# Allegro board PCB_STABILIZATOR_EFTIMIE1.brd
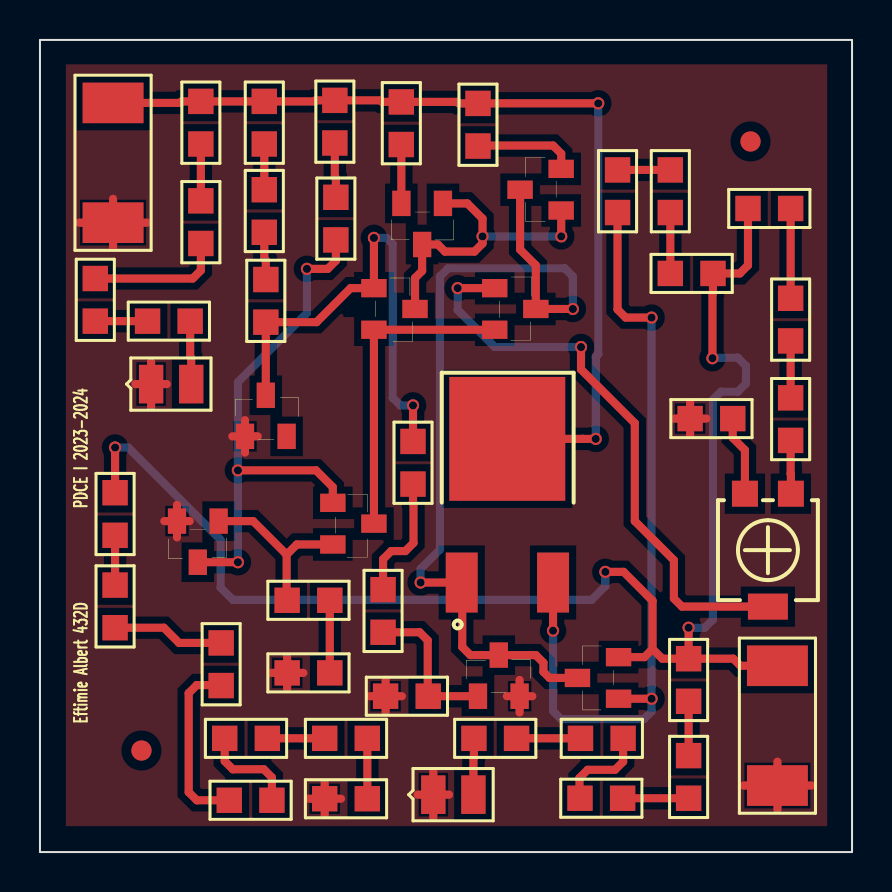
[diagram p0: board, top side]
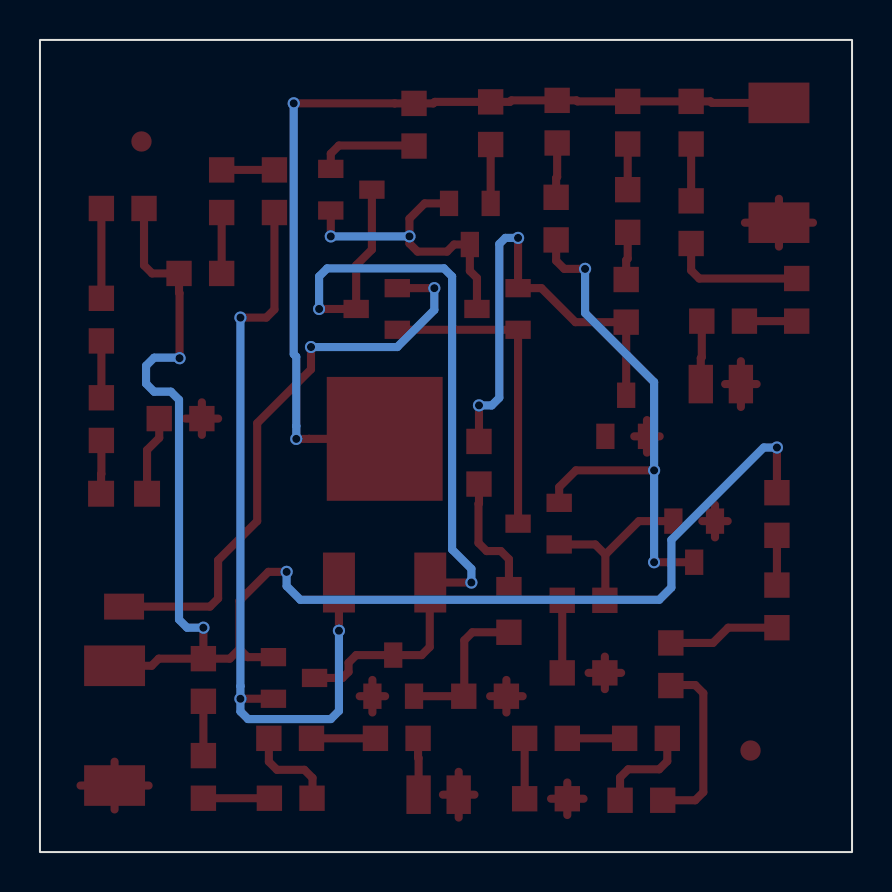
[diagram p1: board, bottom side, seen from below]

Outline 40.64 x 40.64 mm; copper layers: TOP, BOTTOM. Coordinates in mm from the lower left corner of the outline.
Outline path: rectangle 0,0 40.64,40.64

## Design rules (mm)
nets with their own width: min track width 0.406; nets 0 N63757 N63835 N63897 N63943 N63947 N63959 N63973 N63979 N64029 N64035 N64069 N64259 N64293 N64391 N64455 N64475 N64651 N64657 N64663 N64673 N64701 N64747 N64753 N64969 N65063 N65069 N65101 N68388 N68397 N68411 N68435 N637451 N639930 N640550 N640551 N642471 N645031 N647151 N647871

## Placement (name value [footprint] x y rotation side)
D2  BZX84-C5V1  [TO236AA]  10.26 20.8 270 top
D3  SMLS14BET  [SMD0805]  19.68 2.87 0 top
D4  SMLS14BET  [SMD0805]  5.56 23.42 0 top
J1  CON2  [SMR2512]  36.91 9.32 270 top
J2  CON2  [SMR2512]  3.66 37.49 270 top
NOREF  -  []  40.64 0 90 top
NOREF#2  -  [unnamed#2]  5.08 5.08 0 top
NOREF#3  -  [unnamed#2]  35.56 35.56 0 top
NOREF#4  -  []  0 40.64 0 top
Q1  QBC856B  [TO236AA]  20.17 32.46 90 top
Q2  QBC856B  [TO236AA]  26.09 32.11 0 top
Q3  QBC846B  [TO236AA]  16.71 28.22 180 top
Q4  QBC846B  [TO236AA]  22.76 28.22 180 top
Q5  QBC846B  [TO236AA]  14.66 17.48 180 top
Q6  QBC846B  [TO236AA]  8.94 16.56 90 top
Q7  QBC846B  [TO236AA]  28.96 7.67 0 top
Q8  QBC846B  [TO236AA]  21.92 7.8 270 top
Q9  QMJD31C  [DPACK]  21.11 13.49 0 top
R1  100  [SMR0805]  11.23 35.43 90 top
R2  2k  [SMR0805]  11.23 31.01 90 top
R3  1k  [SMR0805]  11.3 26.52 90 top
R4  3.9k  [SMR0805]  14.76 35.48 90 top
R5  680  [SMR0805]  14.81 30.63 90 top
R6  220  [SMR0805]  18.08 35.41 90 top
R7  220  [SMR0805]  21.92 35.33 90 top
R8  100  [SMR0805]  14.5 12.6 180 top
R9  8.2k  [SMR0805]  18.67 18.41 90 top
R10  510  [SMR0805]  17.17 11 90 top
R11  1k  [SMR0805]  17.3 7.8 0 top
R12  0.47  [SMR0805]  31.55 34.14 270 top
R13  0.47  [SMR0805]  31.55 28.96 0 top
R14  5.6k  [SMR0805]  37.57 32.21 180 top
R15  220  [SMR0805]  37.57 25.58 90 top
R16  68  [SMR0805]  37.57 20.6 90 top
R17  10K  [TS53YL]  35.28 17.93 90 top
R18  10k  [SMR0805]  32.54 21.69 0 top
R19  100  [SMR0805]  3.76 15.85 90 top
R20  100  [SMR0805]  3.76 11.23 90 top
R21  10  [SMR0805]  9.07 8.33 90 top
R22  100  [SMR0805]  11.61 2.59 180 top
R23  100  [SMR0805]  11.38 5.69 180 top
R25  10  [SMR0805]  16.38 5.69 180 top
R26  51  [SMR0805]  14.25 2.67 0 top
R32  330  [SMR0805]  8.05 35.43 90 top
R33  100  [SMR0805]  32.46 7.54 90 top
R34  100  [SMR0805]  32.46 2.69 90 top
R35  100  [SMR0805]  27.03 2.69 0 top
R36  100  [SMR0805]  27.05 5.69 0 top
R37  82  [SMR0805]  21.72 5.69 0 top
R38  220  [SMR0805]  8.05 30.45 90 top
R39  330  [SMR0805]  2.77 26.57 90 top
R40  330  [SMR0805]  7.52 26.57 180 top
R41  0.47  [SMR0805]  28.91 34.14 270 top
R42  33  [SMR0805]  12.37 8.97 0 top

## Library data of the parts
D2 = BZX84-C5V1_3
D3 = SMLS14BET_3
D4 = SMLS14BET_2
J1 J2 = CON2
Q1 Q2 = QBC856B_0
Q3-Q8 = QBC846B_0
Q9 = QMJD31C_0
R1-R16 R18-R23 R25 R26 R32-R42 = R
R17 = POT

## Footprints (pads in the part's own frame, mm; a bottom-side part is the same pattern mirrored in y, then rotated)
DPACK
  rect 1.6x3 smd: 1(0,0) 3(4.57,0)
  rect 5.8x6.2 smd: 2(2.28,7.19)
SMD0805
  rect 1.219x1.93 smd: A(2.007,0) C(0,0)
SMR0805
  rect 1.27x1.27 smd: 1(0,0) 2(2.134,0)
SMR2512
  rect 2.032x3.048 smd: 1(0,0) 2(5.994,0)
TO236AA
  rect 1.27x0.914 smd: 1(0,0) 2(0,2.083) 3(-2.057,1.041)
TS53YL
  rect 1.3x1.3 smd: 1(0,0) 3(0,-2.3)
  rect 1.3x2 smd: 2(-5.65,-1.15)
unnamed#2
  round 1.016 smd: (0,0)

## Nets
0: D2.1(A) D3.C D4.C J1.2 J2.2 Q6.2(E) Q8.2(E) R11.1 R18.1 R26.1 R42.1
N63757: D2.3(C) Q3.1(B) R3.1 R9.2
N63835: Q8.1(B) R10.1 R11.2
N63897: Q5.2(E) Q6.1(B) R8.2
N63943: J2.1 Q9.2(C) R1.2 R4.2 R6.2 R7.2 R32.2
N63947: R8.1 R42.2
N63959: Q2.3(C) Q4.3(C) Q7.3(C) Q8.3(C) Q9.1(B)
N63973: Q1.1(B) Q1.3(C) Q2.1(B) Q3.3(C)
N63979: Q1.2(E) R6.1
N64029: Q2.2(E) R7.1
N64035: Q7.1(B) Q9.3(E) R41.2
N64069: R16.1 R17.3(2)
N64259: J1.1 Q7.2(E) R13.2 R14.2 R19.2 R33.2
N64293: Q3.2(E) Q4.2(E) Q5.3(C)
N64391: Q4.1(B) R17.2(T)
N64455: R17.1 R18.2
N64475: Q5.1(B) Q6.3(C) R5.1
N64651: R33.1 R34.2
N64657: R34.1 R35.2
N64663: R35.1 R36.2
N64673: R36.1 R37.2
N64701: R32.1 R38.2
N64747: D4.A R40.1
N64753: R39.1 R40.2
N64969: R12.1 R41.1
N65063: R1.1 R2.2
N65069: R2.1 R3.2
N65101: R4.1 R5.2
N68388: R25.1 R26.2
N68397: R23.1 R25.2
N68411: R22.1 R23.2
N68435: R21.1 R22.2
N637451: R9.1 R10.2
N639930: R20.1 R21.2
N640550: R14.1 R15.2
N640551: R15.1 R16.2
N642471: D3.A R37.1
N645031: R19.1 R20.2
N647151: R38.1 R39.2
N647871: R12.2 R13.1

Pads without a net: D2 2

## Via types
v1: diameter 0.61, hole 0.406, TOP to BOTTOM, 20 vias

## Routing (per net, layer and track width the routed paths; a pad name or vN(x,y) marks a point on that pad's centre or on a via; arc(x,y) is an arc through that point)
0: length 41
  TOP w0.406: 35.2,3.33 J1.2 ; J1.2 36.91,4.52 ; J1.2 36.91,2.13 ; J1.2 38.61,3.33 ; R18.1 33.35,21.69 ; R18.1 32.54,20.88 ; R18.1 31.72,21.69 ; R18.1 32.54,22.5 ; 13.44,2.67 R26.1 ; R26.1 14.25,3.48 ; R26.1 14.25,1.85 ; R26.1 15.06,2.67 ; D2.1 10.9,20.8 ; D2.1 10.26,19.99 ; D2.1 9.63,20.8 ; D2.1 10.26,21.62 ; 6.22,16.56 Q6.2 ; Q6.2 7.49,16.56 ; Q6.2 6.86,17.37 ; Q6.2 6.86,15.75 ; D4.C 6.35,23.42 ; D4.C 5.56,22.28 ; D4.C 5.56,24.56 ; D4.C 4.77,23.42 ; Q8.2 24.64,7.8 ; Q8.2 23.37,7.8 ; Q8.2 24,8.61 ; Q8.2 24,6.98 ; D3.C 20.47,2.87 ; D3.C 19.68,1.73 ; D3.C 18.9,2.87 ; D3.C 19.68,4.01 ; 1.96,31.5 J2.2 ; J2.2 5.36,31.5 ; J2.2 3.66,32.69 ; J2.2 3.66,30.3 ; 17.3,6.98 R11.1 ; R11.1 18.11,7.8 ; R11.1 17.3,8.61 ; R11.1 16.48,7.8 ; R42.1 13.18,8.97 ; R42.1 12.37,9.78 ; R42.1 11.56,8.97 ; R42.1 12.37,8.15
N63757: length 24
  TOP w0.406: v1(16.71,30.73) Q3.1 15.54,28.22 13.84,26.52 R3.1 11.3,22.86 ; R9.2 v1(18.67,22.35)
  BOTTOM w0.406: v1(16.71,30.73) 17.35,30.73 17.65,30.43 17.65,22.73 18.03,22.35 v1(18.67,22.35)
N63835: length 7.7
  TOP w0.406: Q8.1 R11.2 19.41,7.82 19.41,10.59 19,11 R10.1
N63897: length 8.9
  TOP w0.406: 12.34,14.88 12.85,15.39 Q5.2 ; 12.34,14.88 10.67,16.56 Q6.1 ; 12.34,14.88 12.34,12.62 R8.2
N63943: length 45.7
  TOP w0.406: Q9.2 27.18,20.68 27.18,20.68 v1(27.81,20.68) ; J2.1 7.01,37.49 7.09,37.57 R32.2 R1.2 13.74,37.57 13.79,37.62 R4.2 17.04,37.62 17.12,37.54 R6.2 20.88,37.54 20.95,37.47 R7.2 22.89,37.47 22.89,37.47 v1(27.94,37.47)
  BOTTOM w0.406: v1(27.94,37.47) 27.94,24.92 27.81,24.79 27.81,21.31 27.81,21.31 v1(27.81,20.68)
N63947: length 3.6
  TOP w0.406: R8.1 R42.2
N63959: length 44.5
  TOP w0.406: Q7.3 25.5,8.71 25.2,9.02 25.2,9.47 24.82,9.86 Q8.3 21.54,9.86 21.13,10.26 21.13,13.46 Q9.1 v1(19.05,13.49) ; Q2.3 24.03,30.15 24.82,29.36 Q4.3 v1(26.67,27.18)
  BOTTOM w0.406: v1(19.05,13.49) 19.05,14.17 20.02,15.14 20.02,28.8 20.42,29.21 26.26,29.21 26.67,28.8 v1(26.67,27.18)
N63973: length 15.5
  TOP w0.406: Q2.1 v1(26.09,30.81) ; Q1.1 21.39,32.46 22.15,31.7 v1(22.15,30.81) 22.15,30.45 21.74,30.05 20.27,30.05 19.91,30.4 Q1.3 19.13,29.08 18.77,28.73 Q3.3
  BOTTOM w0.406: v1(22.15,30.81) v1(26.09,30.81)
N63979: length 2.9
  TOP w0.406: Q1.2 R6.1
N64029: length 5.1
  TOP w0.406: R7.1 21.95,35.36 25.68,35.36 26.09,34.95 Q2.2
N64035: length 39.8
  TOP w0.406: R41.2 28.91,27.15 29.31,26.75 v1(30.61,26.75) ; v1(30.61,7.67) Q7.1 ; Q9.3 v1(25.68,11.08)
  BOTTOM w0.406: v1(30.61,26.75) 30.61,8.31 30.61,8.31 v1(30.61,7.67) 30.61,7.04 30.23,6.65 26.08,6.65 25.68,7.06 v1(25.68,11.08)
N64069: length 2.7
  TOP w0.406: R17.3 37.58,18.91 37.57,18.93 R16.1
N64259: length 73.9
  TOP w0.406: v1(28.3,14.02) 29.21,14.02 30.66,12.57 30.66,10.16 ; 30.66,10.16 31.14,9.68 R33.2 ; 30.66,10.16 30.25,9.75 Q7.2 ; R33.2 34.7,9.68 35.05,9.32 J1.1 ; R33.2 v1(32.46,11.23) ; R19.2 v1(3.76,20.24) ; R14.2 35.43,29.36 35.03,28.96 R13.2 33.68,27.99 33.66,27.97 v1(33.66,24.71)
  BOTTOM w0.406: v1(33.66,24.71) 33.68,24.74 34.92,24.74 35.33,24.33 35.33,23.44 34.92,23.04 34.09,23.04 33.68,22.63 33.68,11.63 33.27,11.23 v1(32.46,11.23) ; v1(3.76,20.24) 4.42,20.24 9.04,15.62 9.04,13.23 9.65,12.62 27.61,12.62 28.3,13.31 v1(28.3,14.02)
N64293: length 15.7
  TOP w0.406: Q4.2 Q3.2 Q5.3
N64391: length 29.3
  TOP w0.406: R17.2 32.13,12.28 31.72,12.69 31.72,14.61 29.77,16.56 29.77,21.46 27.08,24.16 v1(27.08,25.27) ; Q4.1 v1(20.9,28.22)
  BOTTOM w0.406: v1(20.9,28.22) 20.9,27.13 22.76,25.27 v1(27.08,25.27)
N64455: length 4
  TOP w0.406: R18.2 34.67,20.73 35.28,20.12 R17.1
N64475: length 26.7
  TOP w0.406: Q5.1 14.66,18.26 13.82,19.1 v1(9.91,19.1) ; v1(13.36,29.18) 14.4,29.18 14.81,29.59 R5.1 ; Q6.3 v1(9.91,14.5)
  BOTTOM w0.406: v1(9.91,14.5) v1(9.91,19.1) 9.91,23.52 13.36,26.97 v1(13.36,29.18)
N64651: length 2.7
  TOP w0.406: R34.2 R33.1
N64657: length 3.3
  TOP w0.406: R35.2 R34.1
N64663: length 4.7
  TOP w0.406: R35.1 27,2.72 27,3.71 27.41,4.11 28.78,4.11 29.18,4.52 R36.2
N64673: length 3.2
  TOP w0.406: R37.2 R36.1
N64701: length 2.8
  TOP w0.406: R32.1 R38.2
N64747: length 3.2
  TOP w0.406: D4.A 7.57,24.71 7.52,24.77 R40.1
N64753: length 2.6
  TOP w0.406: R40.2 R39.1
N64969: length 2.6
  TOP w0.406: R41.1 R12.1
N65063: length 2.3
  TOP w0.406: R1.1 R2.2
N65069: length 2.4
  TOP w0.406: R3.2 11.3,29.62 11.23,29.69 R2.1
N65101: length 2.7
  TOP w0.406: R5.2 14.81,33.73 14.76,33.78 R4.1
N68388: length 3
  TOP w0.406: R26.2 R25.1
N68397: length 2.9
  TOP w0.406: R23.1 R25.2
N68411: length 5
  TOP w0.406: R23.2 9.25,4.55 9.65,4.14 11.2,4.14 11.61,3.73 R22.1
N68435: length 9
  TOP w0.406: R22.2 7.85,2.59 7.44,3 7.44,7.95 7.85,8.36 9.04,8.36 R21.1
N637451: length 6.3
  TOP w0.406: R10.2 17.17,14.66 17.58,15.06 18.29,15.06 18.69,15.47 18.69,17.42 18.67,17.45 R9.1
N639930: length 5.6
  TOP w0.406: R21.2 6.96,10.46 6.2,11.23 R20.1
N640550: length 4.5
  TOP w0.406: R14.1 R15.2
N640551: length 2.8
  TOP w0.406: R15.1 R16.2
N642471: length 2.8
  TOP w0.406: D3.A 21.69,4.7 21.72,4.72 R37.1
N645031: length 2.5
  TOP w0.406: R19.1 R20.2
N647151: length 6.8
  TOP w0.406: R39.2 7.65,28.7 8.05,29.11 R38.1
N647871: length 3
  TOP w0.406: R12.2 R13.1

## Copper pours and planes (outline as drawn; the poured copper is in the pictures)
0 on TOP: 1.3,1.3 1.3,39.42 39.4,39.42 39.4,1.3 ; 3 cut-outs

## Text on the board
Ref Des/Silkscreen Top: PDCE I 2023-2024 | Eftimie Albert 432D
XSECTION_CHART: *  SURFACE - AIR 0 MIL | L1: TOP CONDUCTOR - COPPER 1.4 MIL | *  DIELECTRIC - FR-4 61.2 MIL | L2: BOTTOM CONDUCTOR - COPPER 1.4 MIL | DESIGN CROSS SECTION CHART | ___________________________ | TOTAL THICKNESS 64 MIL | 1-2 | FIGURE | SIZE | 16.0 | DRILL CHART: TOP to BOTTOM | ALL UNITS ARE IN MILS | PLATED | QTY | 23
